# EAGLE board MotorDriver2 (EAGLE 7.5.0)
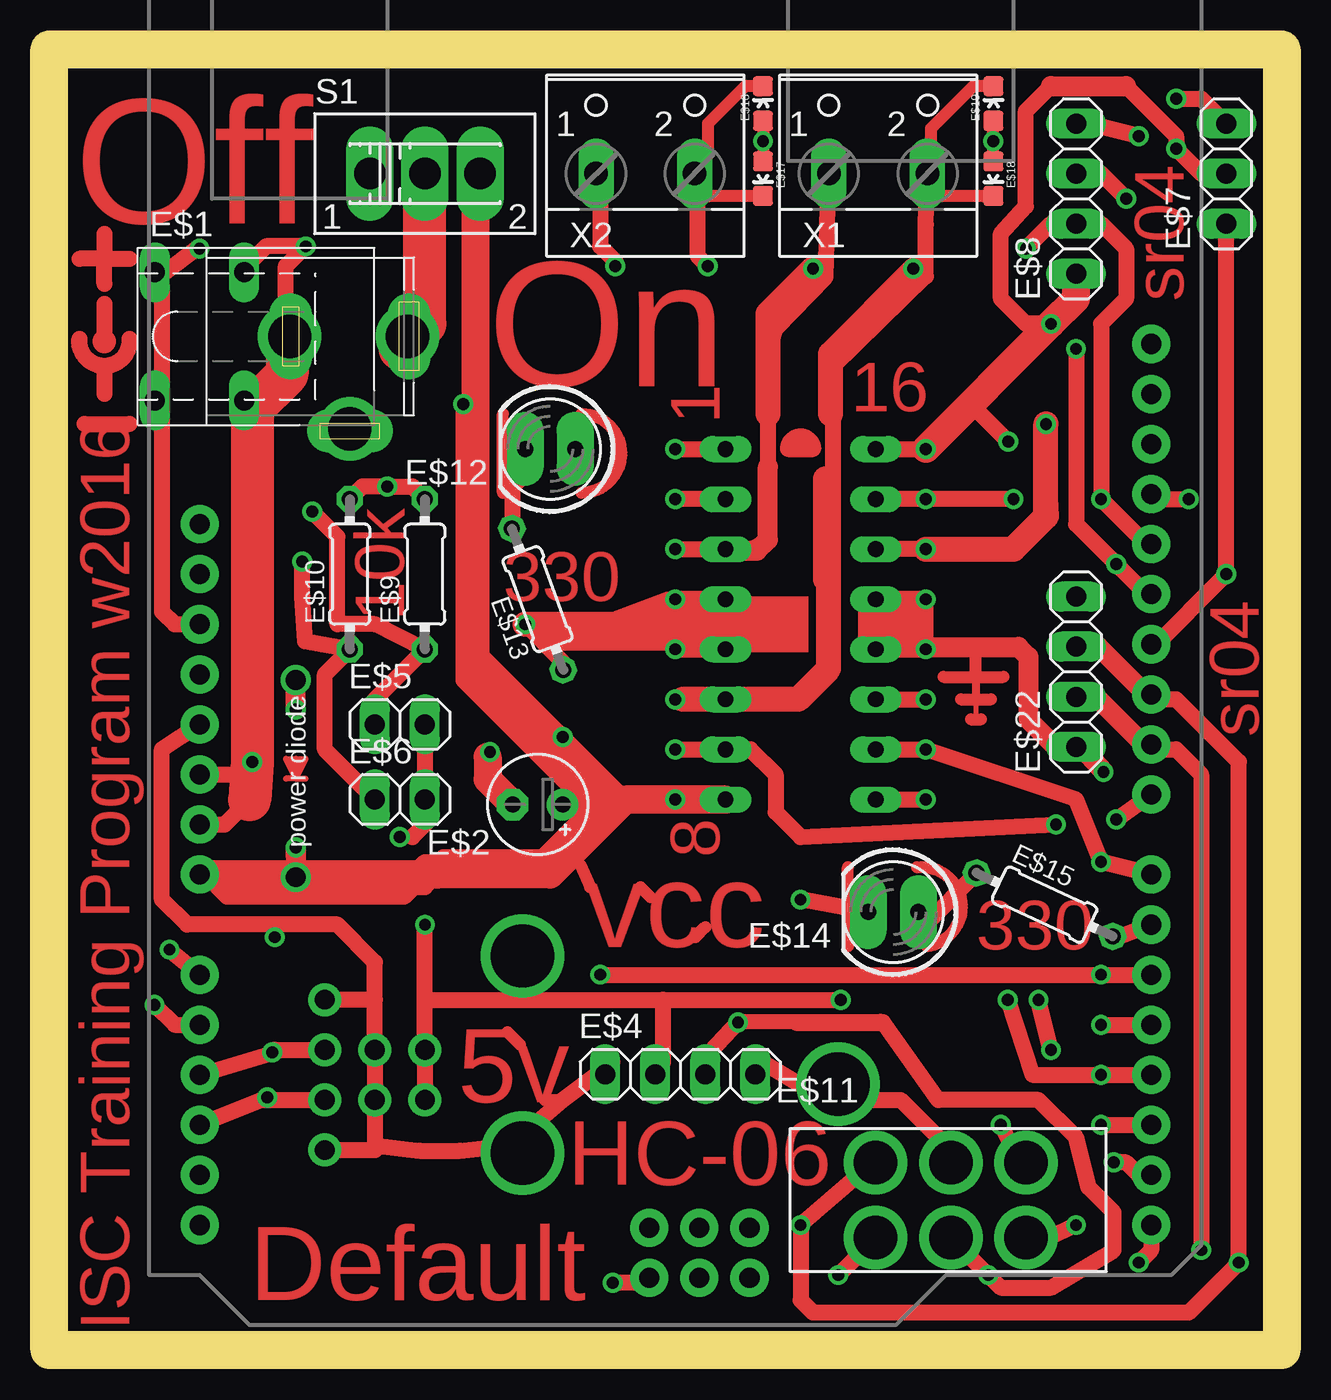
[diagram p0: board, top side]
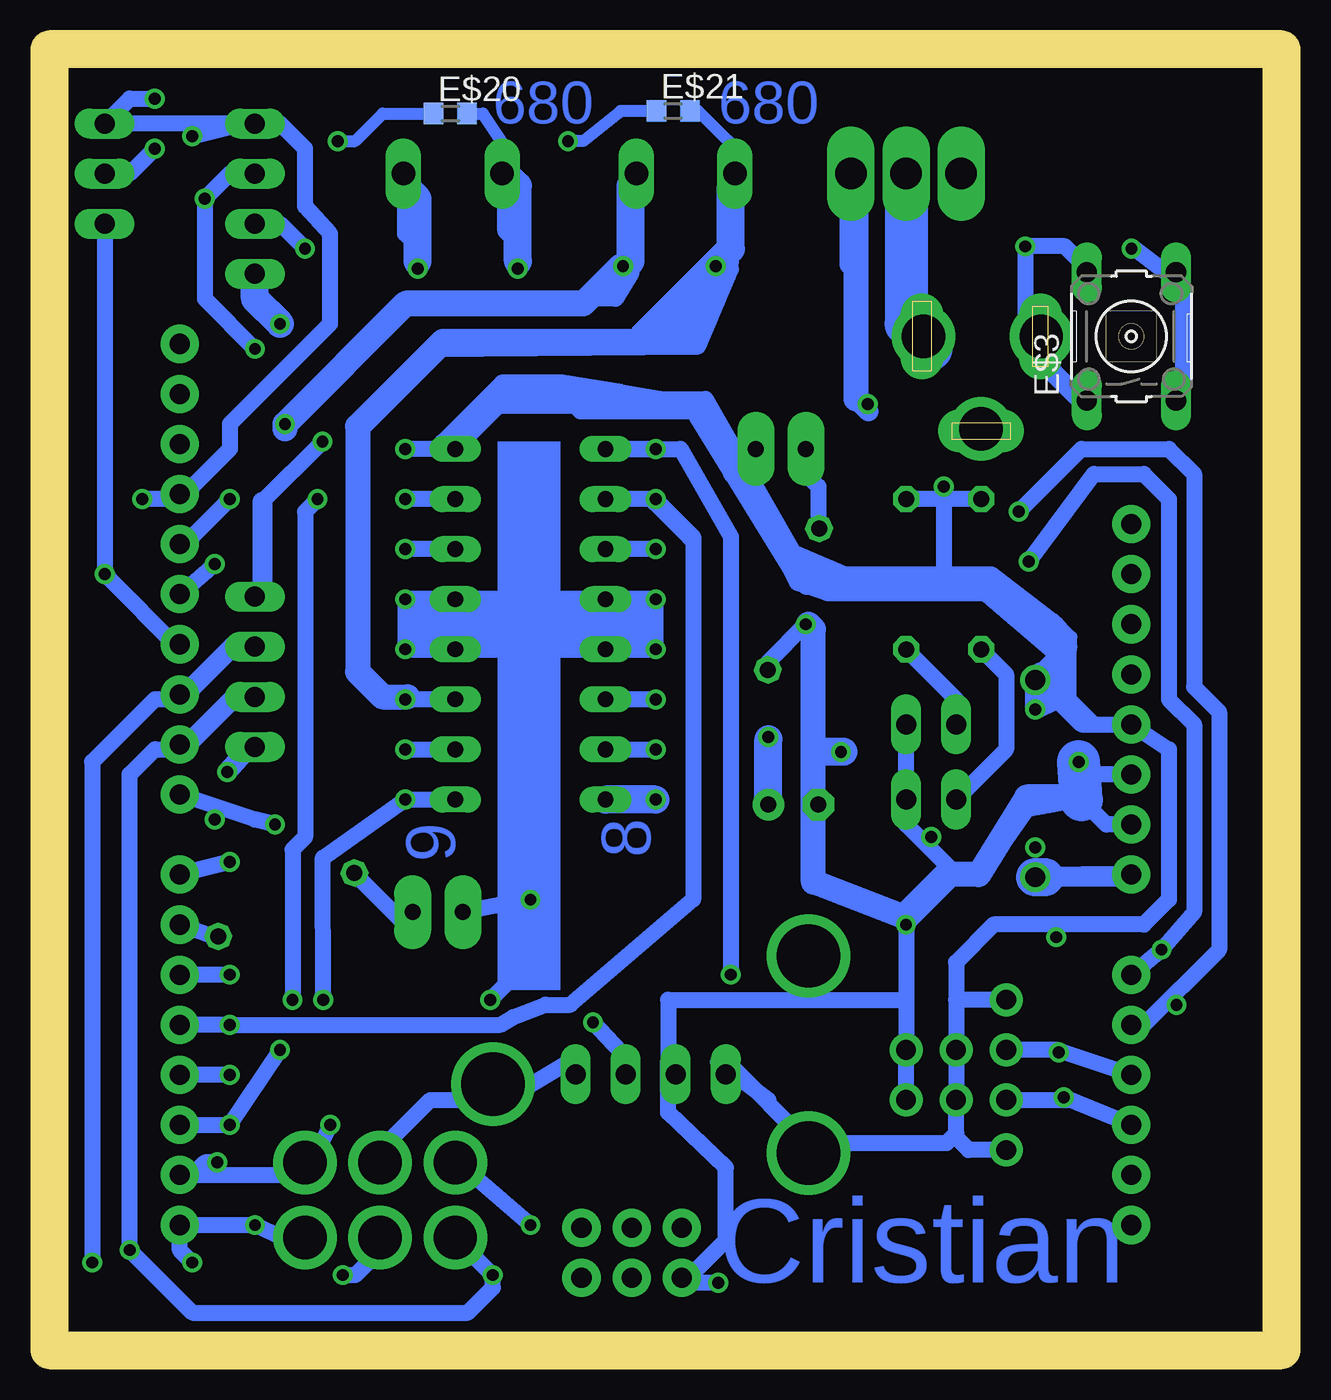
[diagram p1: board, bottom side, seen from below]

Size 62.5 x 66 mm. Coordinates in mm from the lower left corner, seen from the top.
Outline: 0,0 0,66 62.5,66 62.5,0 0,0
Copper layers (1*16): Top 0.035mm / dielectric 1.5mm / Bottom 0.035mm
Design rules "default": minimum track width 10mil, minimum drill 24mil, track to track 8mil, track to pad 8mil, pad to pad 8mil, via to via 8mil, smd to smd 8mil, copper to edge 40mil, drill to drill 8mil, minimum pad ring 10mil, minimum via ring 8mil, stop-mask expansion 4mil, vias tented up to drill 0mil, thermal gap 10mil

## Footprints (pad centres in the part's own frame; a part is rotated, then mirrored left to right if it is on the bottom)
5.5-2.5-BARRELCONNECTOR = drill 0.8 pad 2.184 long: 1 -3,0; 2 0,-4.8 | drill 1 pad 2.184 long: 3 3,0 | drill 2.2: P$1 -3.048,0; P$2 2.921,0; P$3 0,-4.699
E2,5-5 = drill 0.813 pad 1.6: + -1.27,0 | drill 0.813 pad 1.6 octagon: - 1.27,0
BUTTON = drill 1.016 long: 1 -3.251,2.261; 2 3.251,2.261; 3 -3.251,-2.261; 4 3.251,-2.261
1X04 = drill 1.016 long: 1 -3.81,0; 2 -1.27,0; 3 1.27,0; 4 3.81,0
1X02 = drill 1.016 long: 1 -1.27,0; 2 1.27,0
1X03 = drill 1.016 long: 1 -2.54,0; 2 0,0; 3 2.54,0
0204/7 = drill 0.813 octagon: 1 -3.81,0; 2 3.81,0
DUAL_SLIDE_SWITCH = drill 2.2: 1 -3.81,-1.905; 2 0,-1.905; 3 3.81,-1.905; 4 -3.81,1.905; 5 0,1.905; 6 3.81,1.905
LED5MM = drill 0.813 pad 1.88 long: A -1.27,0; K 1.27,0
LED-0603 = smd 1 x 1: A 0,-0.877; C 0,0.877
R0603 = smd 1 x 1.1: 1 -0.85,0; 2 0.85,0
ARDUINO_R3 = drill 1.016 pad 1.93: 3.3V 35.56,2.54; 5V 38.1,2.54; A0 50.8,2.54; A1 53.34,2.54; A2 55.88,2.54; A3 58.42,2.54; A4 60.96,2.54; A5 63.5,2.54; AREF 23.876,50.8; D0 63.5,50.8; D1 60.96,50.8; D2 58.42,50.8; D3 55.88,50.8; D4 53.34,50.8; D5 50.8,50.8; D6 48.26,50.8; D7 45.72,50.8; D8 41.656,50.8; D9 39.116,50.8; D10 36.576,50.8; D11 34.036,50.8; D12 31.496,50.8; D13 28.956,50.8; GND@1 40.64,2.54; GND@2 43.18,2.54; GND@3 26.416,50.8; GND@4 66.18,25.35; IOREF 30.48,2.54; MISO 63.64,30.43; MOSI 66.18,27.89; NC 27.94,2.54; RESET@1 33.02,2.54; RESET@2 63.64,25.35; SCK 63.64,27.89; SCL 18.796,50.8; SDA 21.336,50.8; VCC 66.18,30.43; VIN 45.72,2.54
SLIDE_SWITCH = drill 1.6 long: 1 -2.794,0; 2 0,0; 3 2.794,0
DIP16 = drill 0.8 long: P1 -8.89,-3.81; P2 -6.35,-3.81; P3 -3.81,-3.81; P4 -1.27,-3.81; P5 1.27,-3.81; P6 3.81,-3.81; P7 6.35,-3.81; P8 8.89,-3.81; P9 8.89,3.81; P10 6.35,3.81; P11 3.81,3.81; P12 1.27,3.81; P13 -1.27,3.81; P14 -3.81,3.81; P15 -6.35,3.81; P16 -8.89,3.81
2PIN-SCREW-TERMINAL = drill 1.194 long: 1 -2.5,-1.27; 2 2.5,-1.27

## Placement (x,y rotation side)
E$1  [5.5-2.5-BARRELCONNECTOR]  15.24,51.44 0 top
E$2  [E2,5-5]  24.77,27.69 180 top
E$3  [BUTTON]  7.62,51.44 90 bottom
E$4  [1X04]  32,14 0 top
E$5  [1X02]  17.78,31.75 0 top
E$6  [1X02]  17.78,27.94 0 top
E$7  [1X03]  59.69,59.69 90 top
E$8  [1X04]  52.07,58.42 90 top
E$9  [0204/7]  19.05,39.37 90 top
E$10  [0204/7]  15.24,39.37 90 top
E$11  [DUAL_SLIDE_SWITCH]  45.72,7.62 0 top
E$12  [LED5MM]  25.4,45.72 180 top
E$13  [0204/7]  24.77,38.1 110 top
E$14  [LED5MM]  42.8,22.23 180 top
E$15  [0204/7]  50.48,22.61 335 top
E$16  [LED-0603]  36.2,63.25 0 top
E$17  [LED-0603]  36.2,59.44 180 top
E$18  [LED-0603]  47.88,59.44 180 top
E$19  [LED-0603]  47.88,63.25 0 top
E$20  [R0603]  42.16,62.74 0 bottom
E$21  [R0603]  30.86,62.87 0 bottom
E$22  [1X04]  52.07,34.42 90 top
J1  ARDUINO_UNO_R3  [ARDUINO_R3]  5.08,69.85 270 top
S1  [SLIDE_SWITCH]  19.05,59.69 0 top
U$1  MOTOR_DRIVERDIP16  [DIP16]  38.1,36.83 270 top
X1  [2PIN-SCREW-TERMINAL]  42.04,60.96 0 top
X2  [2PIN-SCREW-TERMINAL]  30.23,60.96 0 top

## Library data of the parts
E$1-E$22 J1 S1 U$1 = ISCTRainingProgram
X1 X2 = ISCTRainingProgram; MPN: 237-102; OC_FARNELL: unknown; OC_NEWARK: 70K9898

## Nets
N$2: U$1.P6 X1.2
N$3: U$1.P14 X2.2
N$4: U$1.P11 X2.1
N$5: E$8.1 E$9.2 E$10.2 J1.5V U$1.P16
N$6: E$5.2 J1.GND@2
N$7: J1.VIN S1.3 U$1.P8
N$8: J1.D2 U$1.P15
N$9: J1.D3 U$1.P9
N$12: J1.D7 U$1.P10
N$14: J1.D5 U$1.P1
N$15: J1.D4
N$16: U$1.P3 X1.1
N$20: J1.D8 U$1.P7
S$1: S1.2
S$4: E$7.3 E$8.4
S$5: E$8.3
S$9: E$7.1
S$11: E$9.1 J1.A1
S$12: E$6.1 E$10.1 J1.A0
S$16: J1.A2
S$20: J1.D0
S$25: J1.D1
S$42: E$14.K
S$48: E$15.1
S$49: E$15.2 J1.D6
S$50: J1.GND@1
S$66: U$1.P4 U$1.P5 U$1.P12 U$1.P13
S$68: U$1.P2
S$72: J1.A3
S$78: J1.RESET@1
S$86: E$2.+
S$105: J1.D10

## Tracks (layer width: path | path; a pad name or v marks a point on that pad's centre or on a via)
N$2  (via drill 0.6)
  Top 0.813: 34.92,33.02 34.8,33.02 U$1.P6 32.13,33.02 v31.75,33.02 | 37.97,33.02 38.1,33.02 39.75,34.54 39.75,49.91 44.45,54.48 44.45,57.11 X1.2
  Top 1.27: 39.5,38.86 39.5,34.54 37.97,33.02 34.92,33.02 | 34.8,33.02 32.13,33.02
  Bottom 0.813: v31.75,33.02 U$1.P6
N$3  (via drill 0.6)
  Top 0.813: v50.55,46.99 50.8,42.29 49.15,40.64 v44.45,40.64 U$1.P14
  Top 1.27: v44.45,40.64 48.9,40.64 50.55,42.29 v50.55,46.99
  Bottom 0.813: U$1.P14 v44.45,40.64 | X2.2 32.98,54.65 33.78,53.34 44.45,53.34 v50.55,46.99
N$4  (via drill 0.6)
  Top 0.813: U$1.P11 v44.45,33.02
  Bottom 0.813: U$1.P11 45.72,33.02 46.99,34.29 46.99,46.99 43.18,50.8 29.59,50.93 28.83,52.7 27.94,54.82 X2.1
N$5  (via drill 0.6, 1 pad 1.68)
  Top 0.813: U$1.P16 v44.45,45.72 | v50.8,52.07 49.53,52.07 48.26,53.34 48.26,56.64 49.53,58.04 49.53,62.87 50.8,64.14 | 54.61,64.14 57.15,61.59 v57.15,60.96 58.42,59.69 | J1.5V 5.71,30.48 5.71,22.86 6.99,21.59 14.61,21.59 16.51,19.68 16.51,17.78 | E$9.2 18.41,43.81 v17.14,43.81 15.88,43.81 E$10.2 | 16.51,17.78 v16.51,15.24 v16.51,12.7 16.51,10.39 | 16.51,10.39 16.51,10.16 v13.97,10.16 | 16.51,10.39 18.78,10.12 20.82,10.12 23.36,10.39 26.04,12.7 28.57,14.61 | 16.51,17.78 v13.97,17.78
  Top 1.016: 50.8,64.14 54.61,64.14
  Top 1.422: v44.45,45.72 v50.8,52.07 52.07,53.34 E$8.1
  Bottom 0.61: 13.34,37.72 13.84,37.72 14.61,38.48 15.11,38.48 15.37,38.73
  Bottom 0.813: 42.55,45.72 U$1.P16 39.37,48.26 29.21,48.26 24.13,39.37 17.14,39.37 | 42.55,45.72 v44.45,45.72 | 9.53,31.75 10.16,31.75 11.43,33.02 11.43,36.83 14.73,39.37 17.14,39.37 | 9.53,31.75 J1.5V 5.71,30.48 5.71,22.86 6.99,21.59 14.61,21.59 16.51,19.68 16.51,17.78 | v57.15,60.96 58.42,59.69 | v17.14,43.81 17.14,39.37 | E$10.2 E$9.2 | 16.51,17.78 v16.51,15.24 v16.51,12.7 16.51,10.79 15.88,10.16 v13.97,10.16 | 9.53,31.75 10.79,33.02 10.79,35.56 14.1,38.35 15.37,38.73 24.13,38.73 | 24.13,38.73 24.77,39.37 | 24.77,39.37 24.77,40.01 25.4,40.64 25.4,41.27 26.04,41.91 26.04,42.55 27.94,44.45 27.94,45.72 29.21,46.99 29.21,47.62 29.84,47.62 | 29.84,47.62 35.56,47.62 36.83,48.9 39.37,48.9 42.55,45.72 | 24.13,38.73 29.84,47.62 | 29.84,47.62 24.77,39.37 | v13.97,17.78 16.51,17.78
  Bottom 1.422: v50.8,52.07 52.07,53.34 E$8.1
N$6  (via drill 0.6, 1 pad 1.68)
  Top 0.813: 19.05,17.78 v19.05,15.24 v19.05,12.7 | 19.05,17.78 v19.05,21.59 | E$5.2 19.05,26.67 18.41,26.04 | 19.05,17.78 31.11,17.78 | 31.11,17.78 31.11,14.61 | J1.GND@2 8.89,26.67 10.16,27.94 | 31.11,17.78 v40.13,17.78
  Top 2.184: 12.06,50.8 12.06,49.53 10.29,47.76 v10.29,29.84 10.16,27.94
  Bottom 0.813: 16.51,24.13 15.37,24.13 15.24,24.13 12.93,27.44 10.16,27.94 8.89,26.67 J1.GND@2 | 16.51,24.13 19.05,26.67 E$5.2 | 16.51,24.13 v19.05,21.59 19.05,17.78 | 19.05,17.78 v19.05,15.24 v19.05,12.7 | 31.11,14.61 31.11,17.78 19.05,17.78 | v40.13,17.78 39.24,18.67
  Bottom 1.27: 10.29,28.07 12.93,28.07 15.37,24.13 17.02,24.13 19.18,21.97 23.75,23.75 23.75,36.58 24,36.83
  Bottom 2.184: 10.16,27.94 v10.29,29.84
N$7  (via drill 0.6)
  Top 0.813: 21.59,59.69 21.59,58.42 21.59,35.56 21.84,35.31 | U$1.P8 v31.75,27.94 29.21,27.94 v26.04,31.11 21.84,35.31 | S1.3 21.84,35.31 | v21,48 21,34 28,27 27,27 | 27,27 25,25 20,25 18,23 9,23 8,24 9.02,24 9.53,23.5 19.05,23.5 19.68,24.13 | 18.41,24.13 19.05,24.77 20.32,24.77 | 27,27 27,29
  Top 1.422: 21.59,58.42 21.59,34.29 27.94,27.94 U$1.P8 29.21,27.94 25.4,24.13 19.68,24.13 18.41,24.13 J1.VIN
  Bottom 0.813: J1.VIN 10.16,24.13
  Bottom 1.422: v31.75,27.94 U$1.P8
N$8  (via drill 0.6)
  Top 0.813: v50.8,15.24 v50.16,17.78 | v53.34,11.43 J1.D2 | v48.9,43.18 U$1.P15
  Bottom 0.813: J1.D2 v53.34,11.43 v50.8,15.24 | U$1.P15 v44.45,43.18 | v48.9,43.18 49.53,42.55 49.53,26.04 50.16,25.4 v50.16,17.78
N$9  (via drill 0.6)
  Top 0.813: v48.6,17.78 49.86,13.97 v53.34,13.97 J1.D3 | U$1.P9 v44.45,27.94
  Bottom 0.813: v53.34,13.97 J1.D3 | U$1.P9 v44.45,27.94 48.63,24.98 v48.6,17.78
N$12  (via drill 0.6)
  Top 0.813: U$1.P10 v44.45,30.48 52.07,27.94 v53.34,24.77 J1.D7
  Bottom 0.813: v44.45,30.48 U$1.P10 | v53.34,24.77 J1.D7
N$14  (via drill 0.6)
  Top 0.813: v27.94,19.05 v53.34,19.05 J1.D5 | v31.75,45.72 U$1.P1
  Bottom 0.813: v31.75,45.72 U$1.P1 30.48,45.72 27.94,41.27 v27.94,19.05 | v53.34,19.05 J1.D5
N$15  (via drill 0.6)
  Top 0.813: v53.34,16.51 J1.D4
  Bottom 0.813: 29.84,41.27 29.84,22.86 36.07,17.53 37.34,17.53 38.99,16.89 39.62,16.51 v53.34,16.51 J1.D4
N$16  (via drill 0.6)
  Top 0.813: X1.1 39.37,54.44 36.83,51.82 36.45,50.55 36.45,47.5 36.45,44.82 36.45,41.02 35.56,40.64 U$1.P3 v31.75,40.64
  Top 1.016: 35.22,40.56 35.89,40.56 36.44,41.11 36.44,44.81 36.45,44.82
  Top 1.27: 36.45,47.5 36.45,52.58 v38.73,54.86
  Bottom 0.813: v31.75,40.64 U$1.P3 | v38.73,54.86 38.73,55.24 38.73,56.13 39.37,56.77 39.37,59.31
  Bottom 1.422: 38.73,55.24 38.73,59.05 39.37,59.69
N$20  (via drill 0.6)
  Top 0.813: v31.75,30.48 U$1.P7 35.56,30.48 36.83,29.21 36.83,27.3 38.1,26.04 v51.05,26.67
  Bottom 0.813: U$1.P7 v31.75,30.48 | v51.05,26.67 52.07,26.92 J1.D8
S$1
  Top 2.184: 17.78,50.8 19.05,52.07 S1.2
  Bottom 2.184: S1.2 19.05,52.07 17.78,50.8
S$2
  Top 0.61: 46.99,34.29 46.99,35.43
S$3  (via drill 0.6)
  Top 0.813: v54.1,26.92 55.88,28.19
S$4  (via drill 0.6)
  Top 0.813: v55.24,61.59 52.7,62.23 51.44,62.23 | E$7.3 58.42,63.5 v57.15,63.5
  Bottom 0.813: E$8.4 50.8,62.23 49.53,60.96 49.53,58.04 48.26,56.64 48.26,52.07 53.34,46.99 53.34,45.72 55.88,43.18 | v55.24,61.59 52.7,62.23 E$8.4 | E$8.4 E$7.3 58.42,63.5 v57.15,63.5
S$5  (via drill 0.6)
  Top 0.813: 52.7,59.69 53.34,59.69 v54.61,58.42 | v52.07,50.8 52.07,41.91 v54.1,39.88 55.88,38.1
  Bottom 0.813: E$8.3 53.34,59.69 v54.61,58.42 54.61,53.34 v52.07,50.8 | 56.01,38.23 v54.1,39.88
S$6  (via drill 0.6)
  Top 0.813: 55.88,43.18 v57.78,43.18
  Bottom 0.813: 55.88,43.18 v57.78,43.18
S$7  (via drill 0.6)
  Top 0.813: v49.53,55.88 50.8,57.15 53.34,57.15 54.61,55.88 54.61,53.34 53.34,52.07 v53.34,43.18 55.88,40.64
  Bottom 0.813: v49.53,55.88 50.8,57.15 | v53.34,43.18 55.88,40.64
S$8  (via drill 0.6)
  Top 0.813: v34.92,16.64 33.15,14.73
  Bottom 0.813: 33.15,14.73 v34.92,16.64
S$9  (via drill 0.6)
  Top 0.813: 55.88,35.56 v59.69,39.37 E$7.1
  Bottom 0.813: E$7.1 v59.69,39.37 55.88,35.56
S$10  (via drill 0.6)
  Top 0.813: 36.2,14.61 v39.37,12.7 43.18,12.7 45.72,10.16
  Bottom 0.813: 45.72,10.16 43.18,12.7 v39.37,12.7 36.2,14.61
S$11  (via drill 0.6)
  Top 0.813: 16.51,33.02 E$9.1 16.51,36.83 14.61,36.83 14.61,41.27 v13.34,42.55 | v5.33,17.53 6.35,16.51 J1.A1
  Bottom 0.813: 16.51,33.02 E$9.1 | v13.34,42.55 10.16,45.72 5.71,45.72 4.45,44.45 4.45,33.66 3.17,32.38 3.17,20.32 6.99,16.51 J1.A1
S$12  (via drill 0.6)
  Top 0.813: E$6.1 13.97,30.48 13.97,34.29 E$10.1 12.97,35.97 12.84,38.23 v12.84,40.01 | v6.1,20.32 J1.A0
  Bottom 0.813: E$10.1 13.97,34.29 13.97,30.48 E$6.1 | v12.84,40.01 9.53,44.45 6.99,44.45 5.71,43.18 5.71,33.02 4.45,31.75 4.45,22.23 v6.1,20.32 J1.A0
S$13
  Bottom 0.813: 45.72,5.08 46.99,3.81 47.5,3.81
S$14  (via drill 0.6)
  other vias: 17.78,26.04
S$15  (via drill 0.6)
  Top 0.813: 55.88,30.48 57.15,30.48 58.42,29.21 v58.42,5.08
  Bottom 0.813: 55.88,30.48 57.15,30.48 58.42,29.21 v58.42,5.08 55.24,1.91 41.27,1.91 40.01,3.17 40.01,3.81 41.91,5.71
S$16  (via drill 1 pad 1.68)
  Top 0.813: J1.A2 11.43,15.11 | 11.43,15.24 v13.97,15.24
  Bottom 0.813: J1.A2 11.43,15.24 v13.97,15.24
S$17
  Bottom 0.813: 44.45,21.59 46.99,24.13
S$18
  Bottom 0.813: 22,55 22,58
S$19
  Top 0.813: 23.5,41.91 23.5,43.81 24.13,44.45
  Bottom 0.813: 24.13,44.45 23.5,43.81 23.5,41.91
S$20  (via drill 0.6)
  Top 0.813: 50.16,5.46 v52.07,6.35 | J1.D0 55.88,5.08 v55.24,4.45
  Bottom 0.813: 50.16,5.46 v52.07,6.35 J1.D0 55.88,5.08 v55.24,4.45
S$21  (via drill 0.6)
  Top 0.813: 55.88,33.02 57.15,33.02 60.33,29.84 v60.33,4.45 57.78,1.91 38.73,1.91 38.1,2.54 v38.1,6.35 41.78,9.53
  Bottom 0.813: 55.88,33.02 57.15,33.02 60.33,29.84 v60.33,4.45 | v38.1,6.35 41.78,9.53
S$22  (via drill 0.6)
  Top 0.813: v40.01,3.81 41.91,5.71
S$23
  Top 0.61: 26.92,24.64 27.43,23.5
S$24
  Top 0.813: 37.47,45.72 arc-180 38.73,45.72 37.47,45.72
S$25  (via drill 0.6)
  Top 0.813: v48.26,11.43 49.53,8.89 | 55.24,8.89 54.61,9.53 v53.98,9.53
  Bottom 0.813: J1.D1 55.24,8.89 | 55.24,8.89 49.53,8.89 v48.26,11.43 | v53.98,9.53 54.61,9.53 55.24,8.89
S$26  (via drill 0.6)
  Top 0.813: 45.72,5.71 v47.62,3.81 48.26,3.17 50.8,3.17 53.98,5.08 53.98,6.99 52.7,8.26 52.07,10.79 50.16,12.7 45.09,12.7 42.29,16.64
S$27
  Top 0.61: 29.97,23.5 30.48,22.99
S$28
  Top 0.61: 32.77,20.95 33.27,21.46
S$29
  Top 0.813: 2.79,56.64 2.79,55.37 | 2.79,54.1 2.79,55.37 | 2.79,55.37 1.52,55.37 | 2.79,55.37 4.06,55.37
S$30
  Top 0.813: 2.79,53.09 2.79,51.31
S$31
  Top 0.813: 4.06,51.31 arc-189 1.52,51.31
S$32
  Top 0.813: 2.79,49.78 2.79,48.51
S$33
  Top 0.813: 1.78,46.99 4.06,46.99
S$34
  Top 0.254: 46.99,33.15 46.99,32
  Top 0.406: 46.99,33.91 46.99,33.15
  Top 0.61: 46.74,32 46.99,32 47.24,32
S$35
  Top 1.016: 44.58,35.69 49.15,35.69 49.66,35.18 49.66,32 50.93,30.73 52.2,30.73 53.47,29.34
S$36
  Top 0.61: 45.34,34.16 48.39,34.16
S$37  (via drill 0.6)
  Top 0.813: 30.23,3.43 v28.57,3.43
  Bottom 0.813: v28.57,3.43 30.23,3.43
S$38
  Top 0.61: 46.23,33.02 47.75,33.02
S$39
  Top 0.61: 34.92,16.76 42.16,16.76 42.55,16.38
S$40
  Top 0.61: 25.15,12.7 25.78,12.7
S$41
  Top 0.61: 23.88,15.49 23.24,16.13
S$42  (via drill 0.6)
  Top 0.813: E$14.K v38.1,22.86
  Bottom 0.813: v38.1,22.86 E$14.K
S$43  (via drill 0.6)
  Top 0.813: v33.4,54.99 32.89,55.5 32.89,59.69
S$44
  Top 1.27: 39.62,47.5 39.62,50.55 43.94,54.86
S$45  (via drill 0.6)
  Bottom 0.813: v43.81,54.86 43.81,55.24 43.81,56.01 44.45,56.64 44.45,59.05 44.45,59.44
  Bottom 1.422: 43.81,55.24 43.81,58.42 44.45,59.05
S$46  (via drill 0.6)
  Top 0.813: 27.94,59.56 27.94,56.01 28.7,55.24 v28.7,54.99
  Bottom 1.27: v28.7,54.99 28.7,54.1 31.62,51.18 42.55,51.18 46.86,46.86 46.86,34.42 45.59,33.15 44.32,33.15
S$47
  Bottom 0.813: 30.23,3.56 28.19,5.59 28.19,9.27 31.11,12.06 31.11,14.48
S$48
  Top 0.813: 44.45,21.59 E$15.1
S$49
  Top 0.813: E$15.2 54.48,21.08 J1.D6
  Bottom 0.813: J1.D6 54.36,21.08 E$15.2
S$50
  Top 0.813: J1.GND@1 10.16,29.21
  Bottom 0.813: J1.GND@1 10.16,29.21
S$51
  Top 0.406: 34.92,16.51 38.1,16.51
  Top 0.61: 37.85,16.51 38.1,16.51 42.29,16.51 42.42,16.38
S$52  (via drill 0.6)
  other vias: 36.2,61.34
S$53  (via drill 0.6)
  Bottom 0.61: v47.88,61.34 46.99,61.34 45.59,62.74 43.43,62.74
S$54
  Top 0.61: 36.2,62.23 36.2,60.33
S$55
  Top 0.61: 47.88,60.45 47.88,61.98
S$56
  Bottom 0.61: 41.15,62.74 40.51,62.74 39.5,61.21
S$57
  Bottom 0.61: 29.84,62.87 29.59,62.87 28.07,61.34 28.07,60.45
S$58
  Bottom 0.61: 32,62.87 33.53,62.87 35.43,61.34 36.2,61.34
S$59
  Top 0.61: 35.81,64.14 35.31,64.14 33.4,62.23 33.4,60.96
S$60
  Top 0.61: 35.94,58.55 33.4,58.55
S$61
  Top 0.61: 47.37,58.55 44.83,58.55
S$62
  Top 0.61: 47.62,64.14 46.86,64.14 44.7,61.98 44.7,60.96
S$63  (via drill 3.2)
  other vias: 40,13.5
S$64  (via drill 3.2)
  other vias: 24,20
S$65  (via drill 3.2)
  other vias: 24,10
S$66  (via drill 0.6)
  Top 0.61: v44.45,35.56 49.53,35.56
  Top 0.813: U$1.P13 v44.45,38.1 v44.45,35.56 U$1.P12 | U$1.P5 v31.75,35.56 31.75,36.83 | U$1.P4 v31.75,38.1 31.75,36.83 | 31.75,36.83 v24.13,36.83 26.04,34.92
  Top 1.27: v24.13,36.83 32,36.83
  Bottom 0.813: U$1.P13 v44.45,38.1 | v44.45,38.1 v44.45,35.56 v31.75,35.56 v31.75,38.1 v44.45,38.1 | v24.13,36.83 26.04,34.92
S$67
  Bottom 0.61: 10.67,35.69 10.67,36.2 11.56,37.08
S$68  (via drill 0.6)
  Top 0.813: U$1.P2 v31.75,43.18
  Bottom 0.813: v31.75,43.18 U$1.P2
S$69
  Bottom 0.61: 29.84,41.4 31.62,43.18 31.88,42.93 30.1,41.15
S$70
  Bottom 1.27: 50.55,46.74 50.55,46.99 44.45,53.09 35.43,53.09 33.53,54.99
S$71
  Top 1.27: 39.37,39.12 39.37,44.2
S$72  (via drill 0.6, 1 pad 1.68)
  Top 0.813: v13.97,12.7 10.79,12.7 J1.A3
  Bottom 0.813: v13.97,12.7 10.79,12.7 | J1.A3 v11.05,12.83
S$73
  Top 0.813: 7.63,56 5,54
S$74
  Bottom 1.016: 21.59,48.26 20.95,47.62
  Bottom 1.27: 21.59,57.78 21.59,48.26
S$75  (via drill 0.6)
  Top 0.813: 12,52 12,55 v13,56 11,56 10,55
  Bottom 0.813: 10,55 11,56 v13,56 13,51
S$76
  Bottom 0.813: 5,48 5,54 7.63,56
S$77  (via drill 0.6)
  other vias: 11.3,15.11
S$78
  Top 0.813: 5.08,53.98 5.71,53.98 5.71,37.47 6.35,36.83 J1.RESET@1
S$79  (via drill 0.6)
  other vias: 7.62,55.88
S$80  (via drill 0.6)
  other vias: 22.35,30.35
S$81
  Bottom 1.422: 30.48,51.44 29.21,52.7
S$82
  Bottom 1.422: 32.38,51.44 27.94,55.88 27.94,59.05
S$83
  Bottom 1.422: 33.02,55.24 33.02,59.05
S$84  (via drill 0.6)
  other vias: 11.43,20.95
S$85
  Bottom 1.422: 22.23,30.35 23.62,30.35
S$86
  Bottom 1.422: E$2.+ 26.04,30.99
S$87
  Top 1.422: 22.23,30.1 22.23,28.96 23.37,27.81
S$88
  Bottom 0.813: 28.57,14.61 26.04,12.7
S$89
  Bottom 0.813: 16.5,11 17,10.5 24,10.5 28,14.5
S$90
  Bottom 1.016: 10,48 12,50
S$91
  Top 0.61: 23,43.5 23,47.5
S$92
  Top 0.61: 40.5,20.5 40.5,24.5
S$93
  Top 0.61: 44,24.5 arc-180 44.5,20.5 | 27,47.5 arc-180 27,43.5
S$94
  Top 1.016: 25.5,36 32,36
S$95  (via drill 1)
  Bottom 1.016: 7.5,24 12,24
  Bottom 1.93: v12.5,24 12,24
S$96
  Top 0.305: 12,30 12.5,30 | 13,30 12.5,29 | 12.5,29 12,30 | 12.5,30 12.5,29.5 | 12.5,29.5 12,30 | 12.5,30 13,30 | 13,30 12.5,29.5 | 12.5,29.5 12.5,29 | 12.5,29 13,29 | 12.5,29 12,29
S$97  (via drill 0.6, 1)
  Top 1.016: v12.5,32.5 v12.5,34
  Bottom 0.305: 11.5,35 11.5,34 11.5,33
  Bottom 1.016: v12.5,34 v12.5,32.5 11.5,33 v12.5,34 | v12.5,34 11.5,35
  Bottom 1.93: 11.5,34 12,34
S$98
  Top 1.016: 31.5,38 27.5,36.5
S$99  (via drill 0.6)
  other vias: 53.47,29.34
S$100  (via drill 0.6)
  Top 1.016: 12.5,25 v12.5,25.5 12.5,24.5
S$101
  Bottom 1.016: 11.5,35.5 15,38.5 | 15,38.5 15.5,39 | 15,38.5 23,38.5 | 23,38.5 25,40.5 21.5,39 | 23,38.5 24.5,39 25,40
S$102
  Bottom 1.016: 42.5,46 39.5,49 36.5,49 33.5,48.5 30.5,48
S$103
  Bottom 1.016: 35.5,48 40,48
S$104
  Bottom 1.016: 53.47,29.34 52.32,30.61
S$105
  Top 1.016: 52.7,35.69 53.21,35.69 55.63,33.27
  Bottom 1.016: J1.D10 55.63,33.27 53.21,35.69 52.7,35.69
S$106
  Top 1.016: 55.63,30.73 55.5,30.73 53.09,33.15 52.7,33.15
  Bottom 1.016: 52.7,33.15 53.09,33.15 55.5,30.73 55.63,30.73
S$107  (via drill 0.6)
  Top 0.813: v48.64,46.1 46.99,47.75
  Bottom 0.813: v48.64,46.1 51.69,43.05
  Bottom 1.016: 51.69,43.05 51.69,38.35
(copper drawn outside any net)
  shapes: Bottom area x3, Top area x3, Top circle x1

## Text on the board
Top: Off | sr04 | On | 16 | 1 | 330 | 10k | sr04 | 8 | vcc | 330 | 5v | HC-06 | Default | ISC Training Program w2016
Bottom: 680 | 680 | 8 | 9 | Cristian
tNames: power diode